# EAGLE board adc module (EAGLE 6.1)
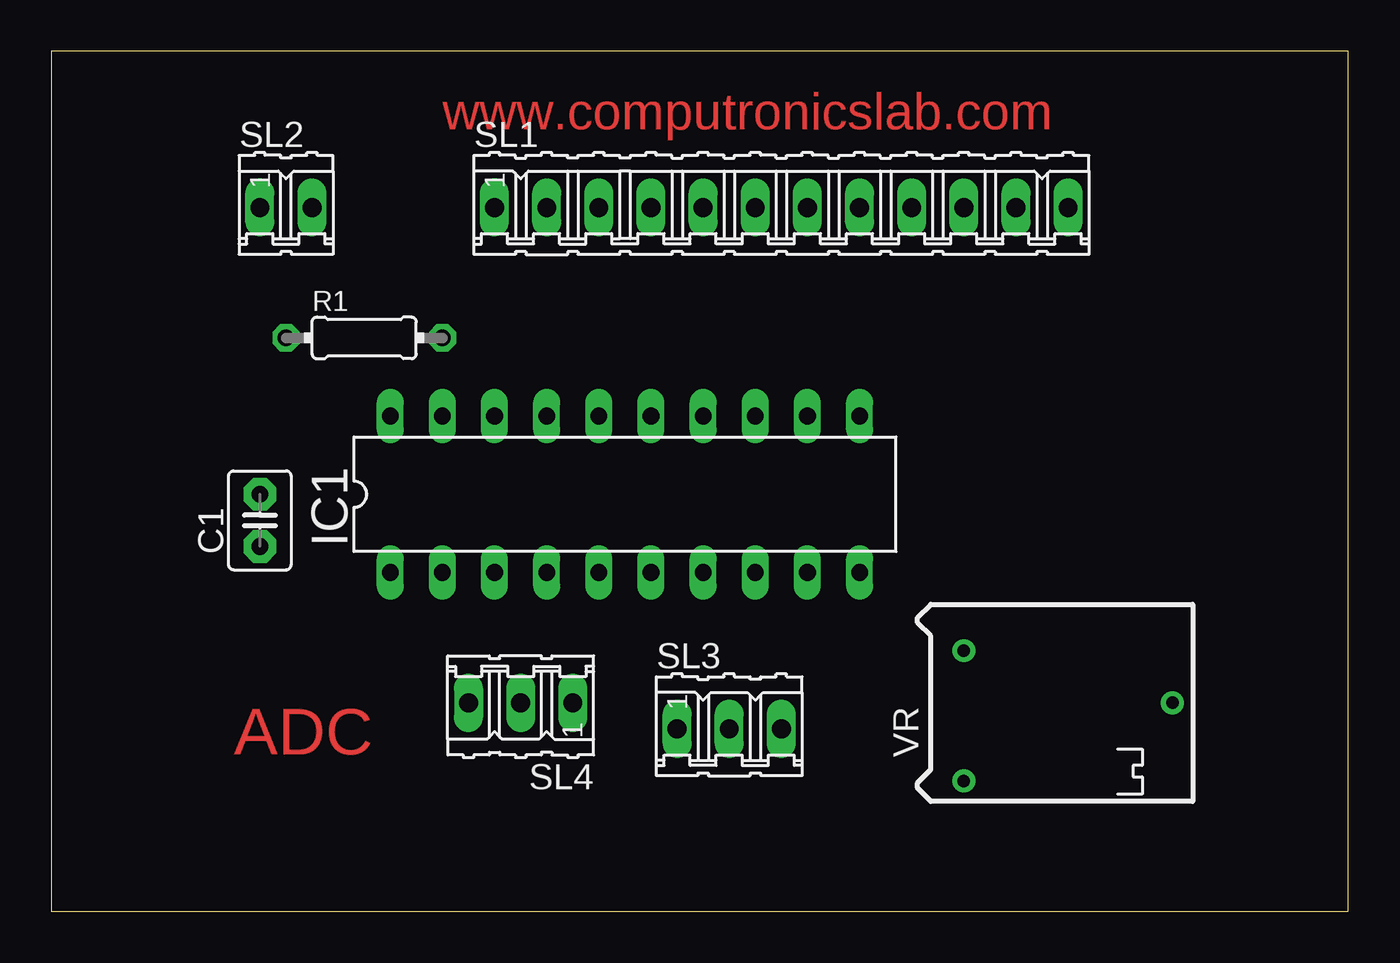
[diagram p0: board, top side]
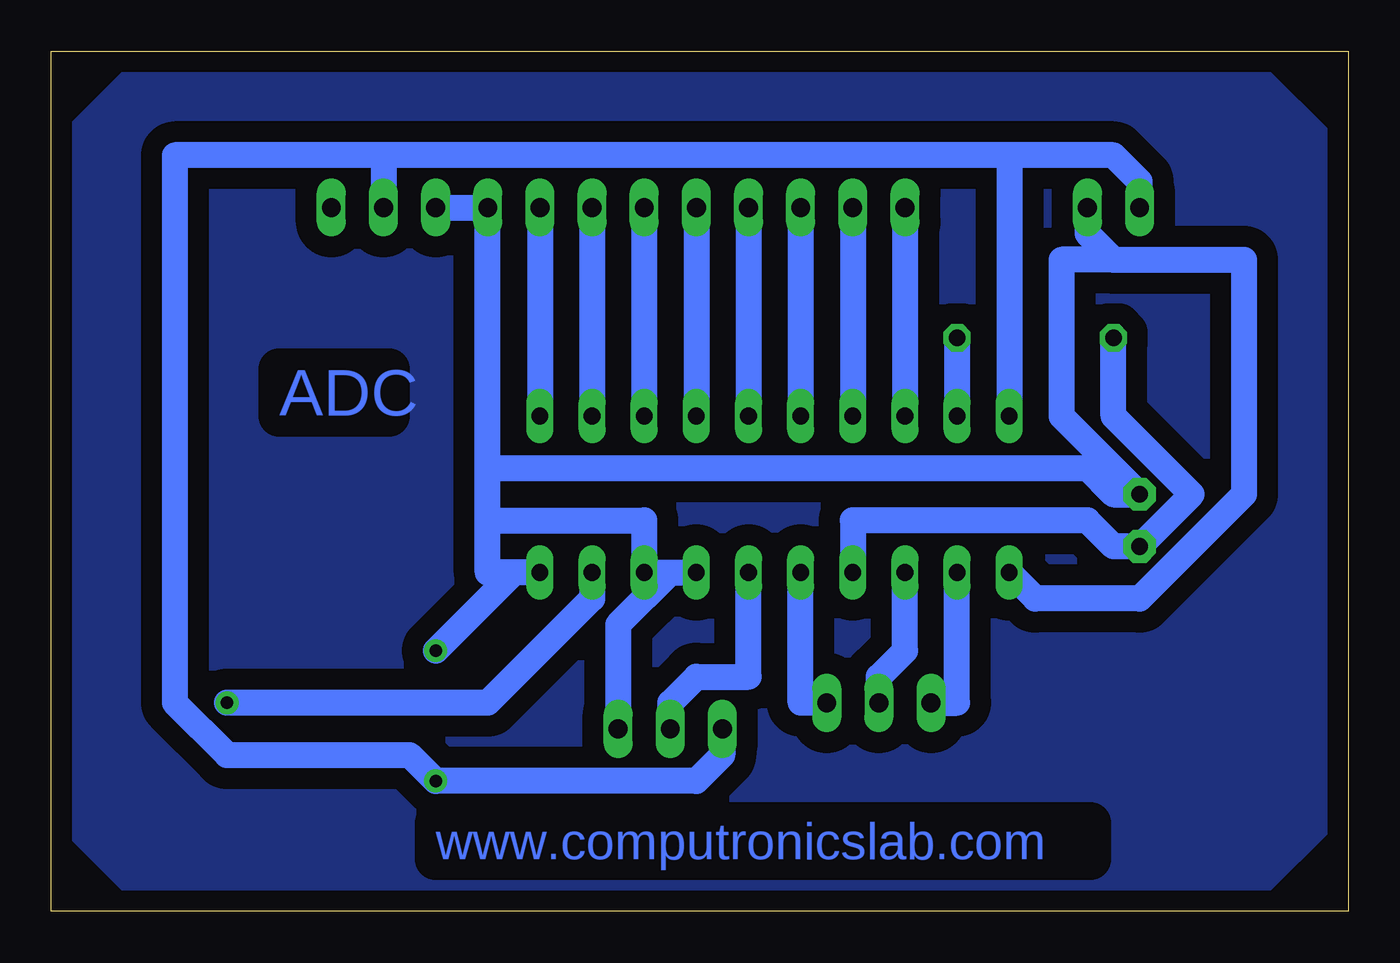
[diagram p1: board, bottom side, seen from below]

Size 63.17 x 41.9 mm. Coordinates in mm from the lower left corner, seen from the top.
Outline: 0,0 63.17,0 63.17,41.9 0,41.9 0,0
Copper layers (1*16): Top 0.035mm / dielectric 1.5mm / Bottom 0.035mm
Design rules: minimum track width 50mil, minimum drill 24mil, track to track 8mil, track to pad 8mil, pad to pad 8mil, via to via 8mil, smd to smd 8mil, copper to edge 40mil, drill to drill 8mil, minimum pad ring 10mil, minimum via ring 8mil, stop-mask expansion 4mil, vias tented up to drill 0mil, thermal gap 10mil

## Footprints (pad centres in the part's own frame; a part is rotated, then mirrored left to right if it is on the bottom)
C2.5-3 = drill 0.813 pad 1.6 octagon: 1 -1.27,0; 2 1.27,0
DIL20 = drill 0.813 long: 1 -11.43,-3.81; 2 -8.89,-3.81; 3 -6.35,-3.81; 4 -3.81,-3.81; 5 -1.27,-3.81; 6 1.27,-3.81; 7 3.81,-3.81; 8 6.35,-3.81; 9 8.89,-3.81; 10 11.43,-3.81; 11 11.43,3.81; 12 8.89,3.81; 13 6.35,3.81; 14 3.81,3.81; 15 1.27,3.81; 16 -1.27,3.81; 17 -3.81,3.81; 18 -6.35,3.81; 19 -8.89,3.81; 20 -11.43,3.81
0204/7 = drill 0.813 octagon: 1 -3.81,0; 2 3.81,0
12P = drill 0.914 long: 1 -13.97,0; 2 -11.43,0; 3 -8.89,0; 4 -6.35,0; 5 -3.81,0; 6 -1.27,0; 7 1.27,0; 8 3.81,0; 9 6.35,0; 10 8.89,0; 11 11.43,0; 12 13.97,0
02P = drill 0.914 long: 1 -1.27,0; 2 1.27,0
03P = drill 0.914 long: 1 -2.54,0; 2 0,0; 3 2.54,0
RTRIM64P = drill 0.61: 1 -2.54,-3.81; 2 7.62,0; 3 -2.54,2.54

## Placement (x,y rotation side)
C1  150pf  [C2.5-3]  10.16,19.05 90 top
IC1  adc804  [DIL20]  27.94,20.32 0 top
R1  10k  [0204/7]  15.24,27.94 0 top
SL1  [12P]  35.56,34.29 0 top
SL2  [02P]  11.43,34.29 0 top
SL3  LM35  [03P]  33.02,8.89 0 top
SL4  [03P]  22.86,10.16 180 top
VR  10k  [RTRIM64P]  46.99,10.16 0 top

## Library data of the parts
C1 = capacitor-wima
IC1 = atmel; MPN: ATF16V8CZ-15PU; OC_FARNELL: 1551768; OC_NEWARK: 94M6254
R1 = eagle-ltspice; SPICEMODEL: NONE; SPICEPREFIX: R
SL1-SL4 = con-amp-quick; OC_FARNELL: unknown; OC_NEWARK: unknown
VR = resistor

## Nets
N$1: IC1.18 SL1.1
N$2: IC1.17 SL1.2
N$3: IC1.16 SL1.3
N$4: IC1.15 SL1.4
N$5: IC1.14 SL1.5
N$6: IC1.13 SL1.6
N$7: IC1.12 SL1.7
N$8: IC1.11 SL1.8
N$9: IC1.19 R1.2
N$10: C1.1 IC1.4 R1.1
N$12: IC1.2 SL4.3
N$13: IC1.3 SL4.2
N$14: IC1.6 SL3.2
N$15: IC1.5 SL4.1
N$17: IC1.9 VR.2
N$18: C1.2 IC1.1 IC1.7 IC1.8 IC1.10 SL1.9 SL1.10 SL2.2 SL3.3 VR.3
N$19: IC1.20 SL1.11 SL2.1 SL3.1 VR.1

## Tracks (layer width: path | path; a pad name or v marks a point on that pad's centre or on a via)
N$1
  Bottom 1.27: SL1.1 IC1.18
N$2
  Bottom 1.27: SL1.2 IC1.17
N$3
  Bottom 1.27: SL1.3 IC1.16
N$4
  Bottom 1.27: SL1.4 IC1.15
N$5
  Bottom 1.27: SL1.5 IC1.14
N$6
  Bottom 1.27: SL1.6 IC1.13
N$7
  Bottom 1.27: SL1.7 IC1.12
N$8
  Bottom 1.27: SL1.8 IC1.11
N$9
  Bottom 1.27: R1.2 IC1.19
N$10
  Bottom 1.27: IC1.4 24.13,19.05 12.7,19.05 11.43,17.78 C1.1 7.62,20.32 11.43,24.13 R1.1
N$11
  pour Bottom (isolate 1.016): 5.08,0 0,5.08 0,36.83 5.08,41.91 58.42,41.91 63.5,36.83 63.5,5.08 58.42,0
N$12
  Bottom 1.27: IC1.2 19.05,10.16 SL4.3
N$13
  Bottom 1.27: IC1.3 21.59,12.7 22.86,11.43 SL4.2
N$14
  Bottom 1.27: IC1.6 29.21,11.43 31.75,11.43 33.02,10.16 SL3.2
N$15
  Bottom 1.27: IC1.5 26.67,10.16 SL4.1
N$17
  Bottom 1.27: VR.2 41.91,10.16 36.83,15.24 IC1.9
N$18
  Bottom 1.27: IC1.1 15.24,15.24 10.16,15.24 5.08,20.32 5.08,31.75 11.43,31.75 | 11.43,31.75 12.7,33.02 SL2.2 | 11.43,31.75 13.97,31.75 13.97,24.13 C1.2 11.43,20.32 12.7,21.59 41.91,21.59 | 33.02,16.51 IC1.8 34.29,19.05 41.91,19.05 | 33.02,16.51 IC1.7 | SL3.3 35.56,13.97 33.02,16.51 | SL1.10 SL1.9 41.91,21.59 | 40.64,16.51 VR.3 | IC1.10 40.64,16.51 | 41.91,19.05 41.91,16.51 40.64,16.51 | 41.91,19.05 41.91,21.59
N$19
  Bottom 1.27: SL3.1 30.48,7.62 31.75,6.35 VR.1 45.72,7.62 54.61,7.62 57.15,10.16 57.15,36.83 46.99,36.83 | 16.51,36.83 IC1.20 | 16.51,36.83 11.43,36.83 10.16,35.56 SL2.1 | 46.99,36.83 SL1.11 | 16.51,36.83 46.99,36.83

## Text on the board
Top: www.computronicslab.com | ADC
Bottom: ADC | www.computronicslab.com